# Altium PCB PCB DEMO.PcbDoc
Units mil, origin at the board's own origin, x right, y up, seen from the top; angles counter-clockwise.
Board outline 6000 x 4000 mil, 2 copper layers (Top Layer, Bottom Layer); 42 components, 28 nets, 130 pads, 22 vias.
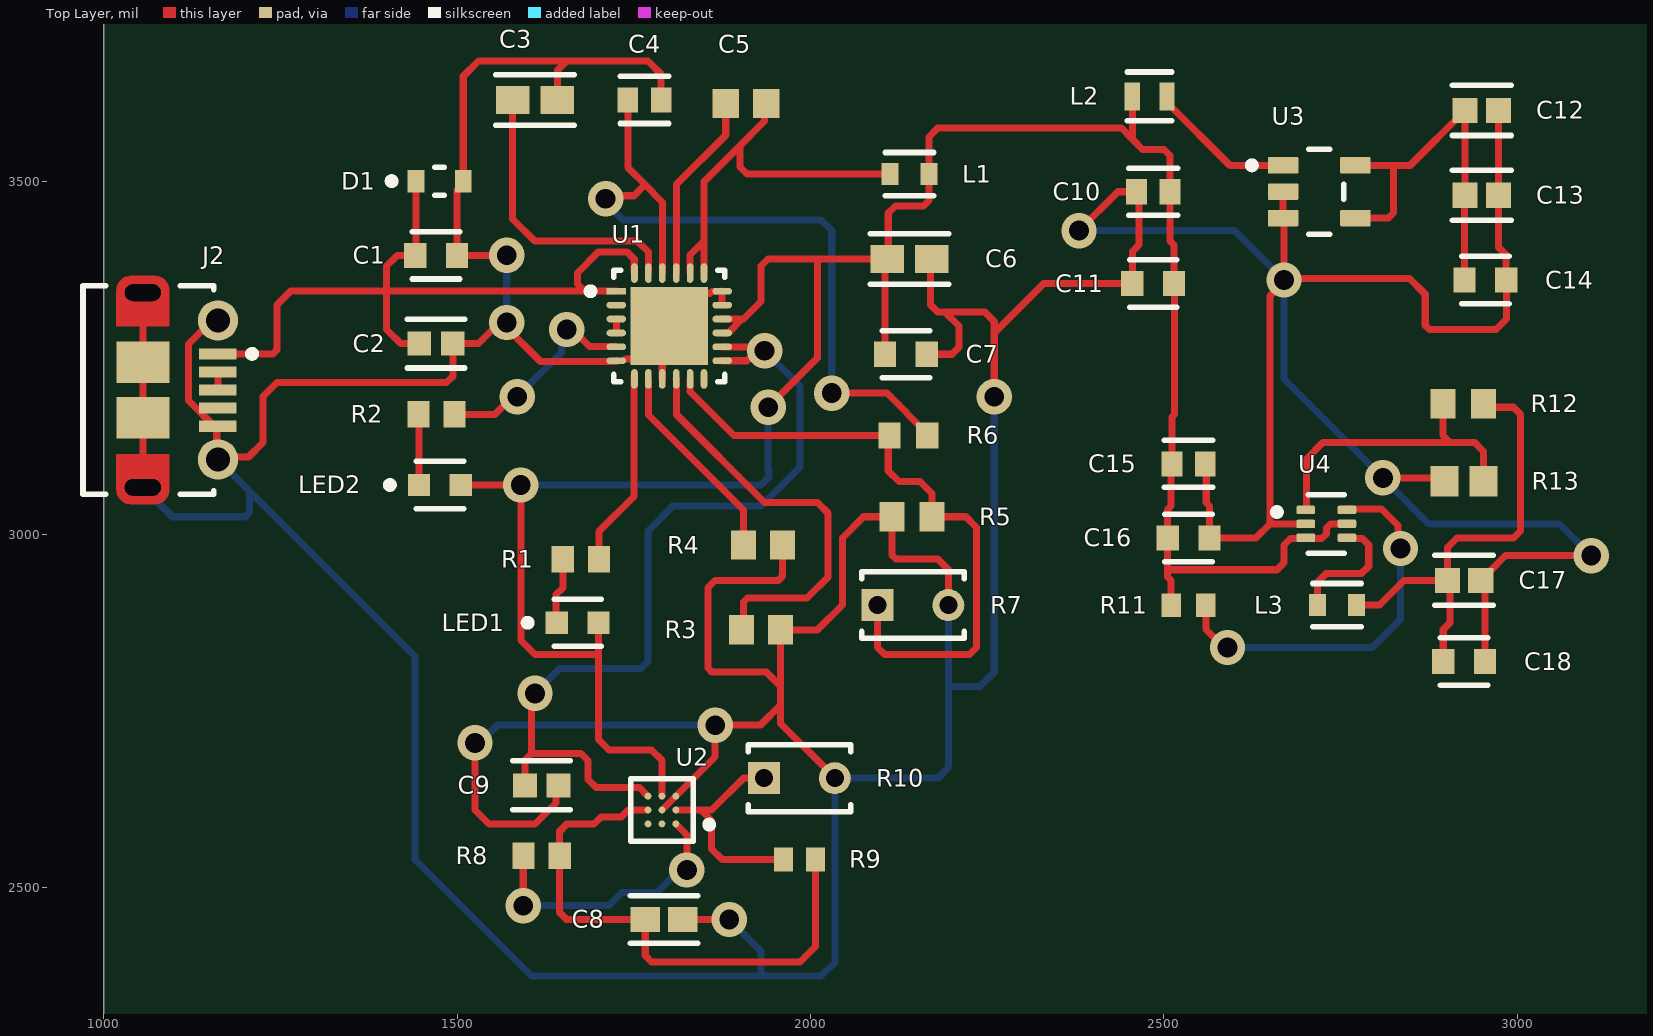
[diagram p0: Top Layer view]
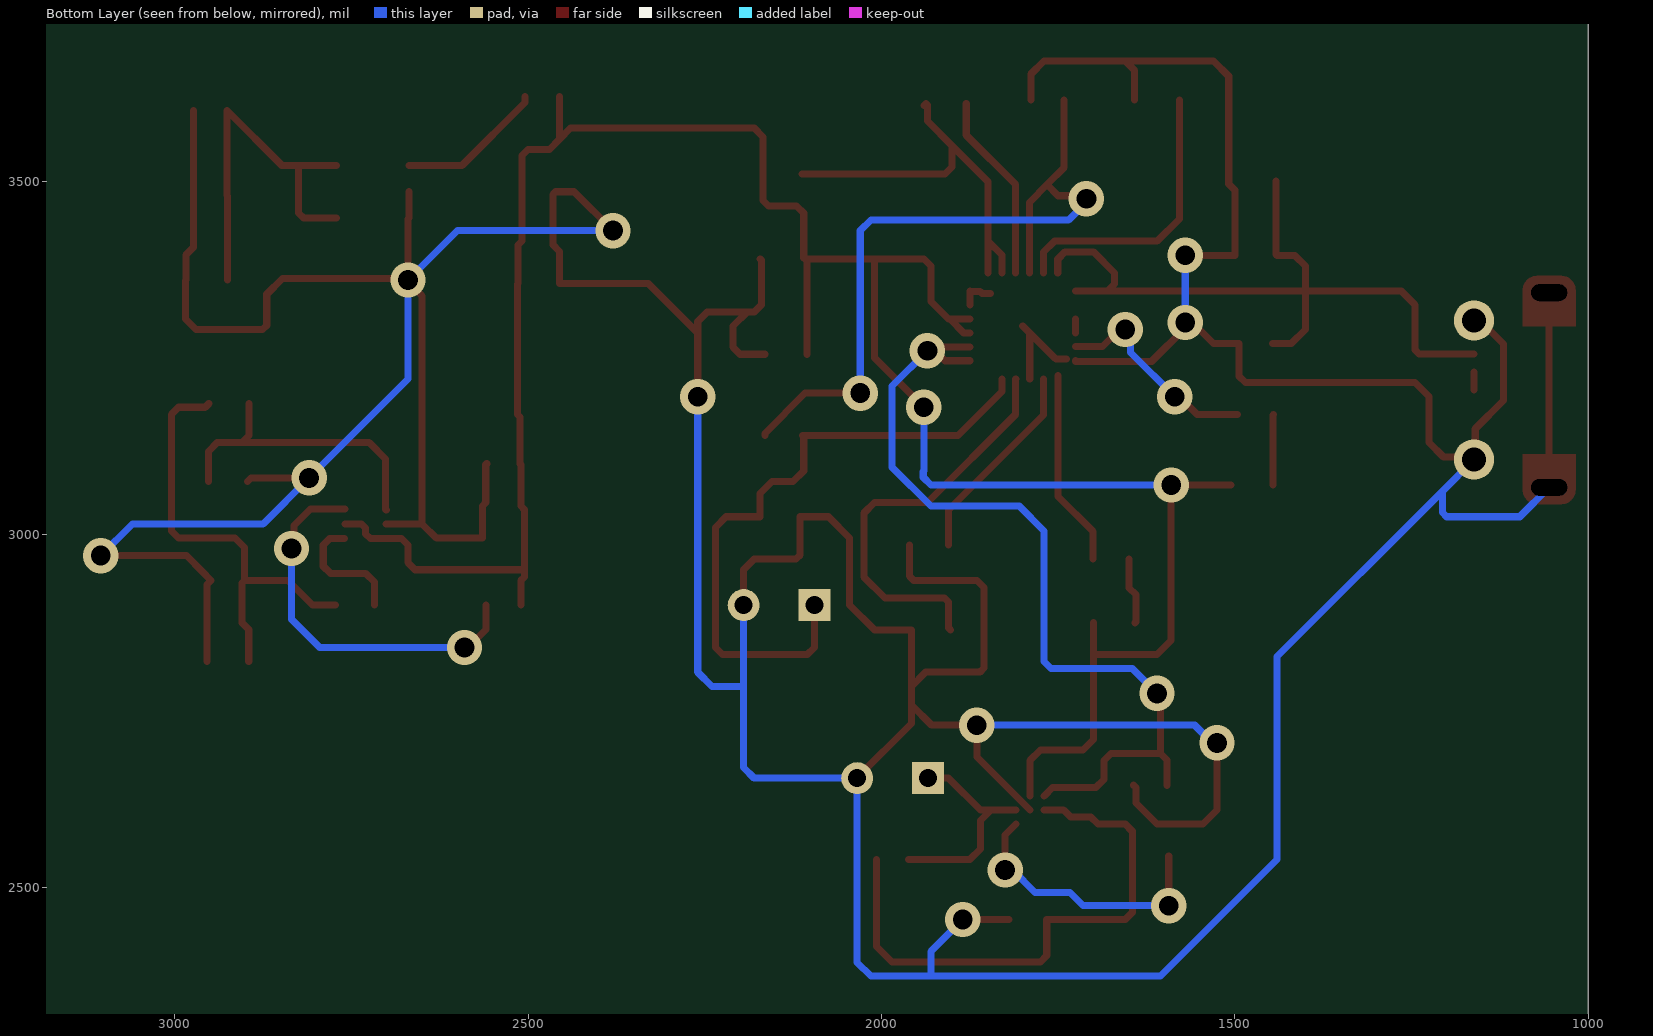
[diagram p1: Bottom Layer view, seen from below]
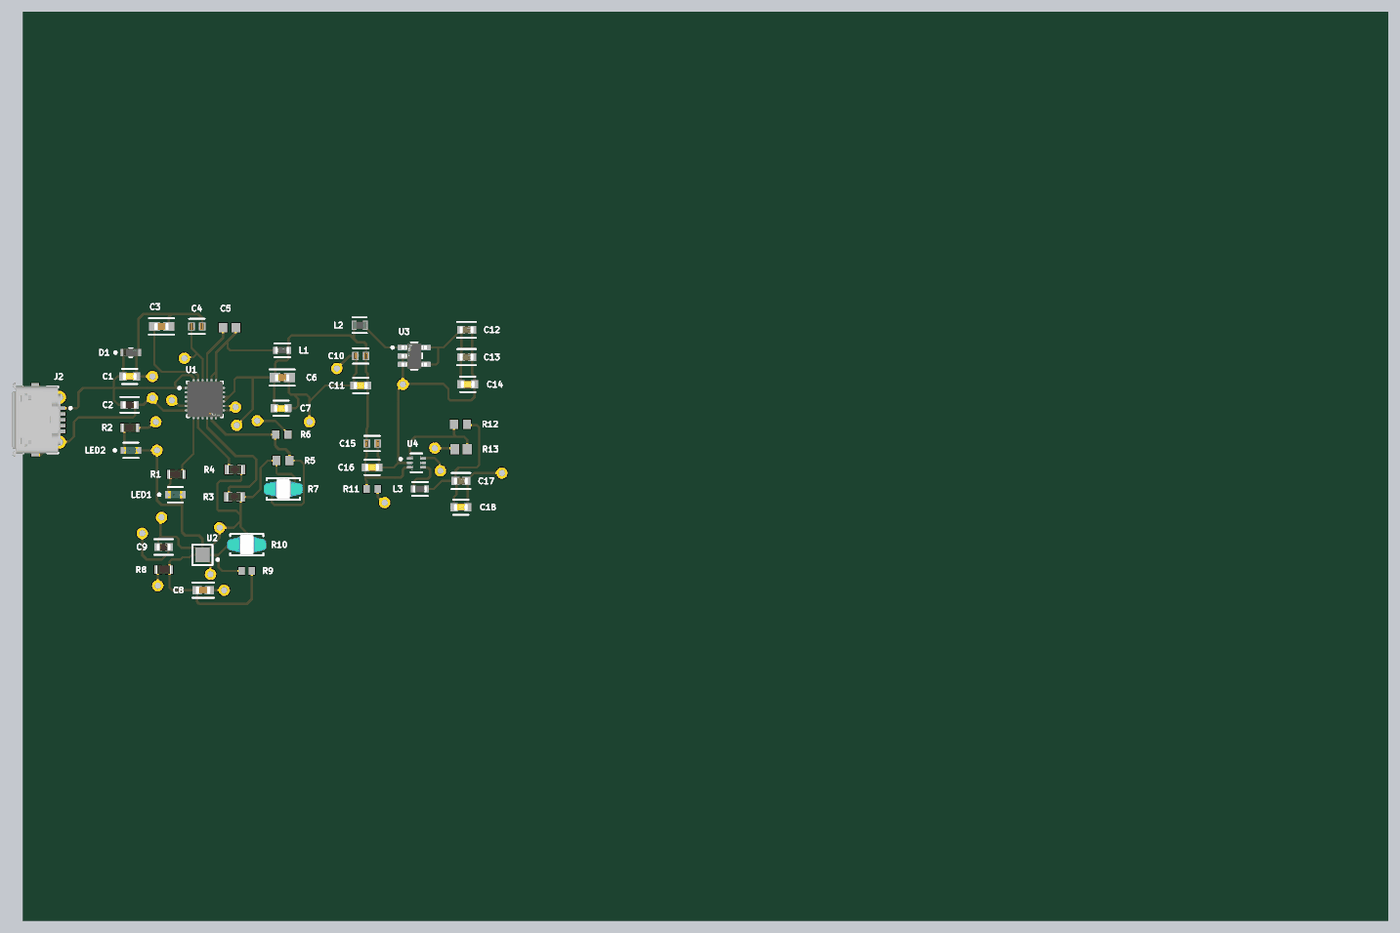
[diagram p2: 3D render of the assembled board from above, using the file's embedded part models]

## Layer stack, top to bottom
Top Solder: solder mask 0.4, Solder Resist, Dk 3.5
Top Layer: signal copper 1.4
Dielectric 1: dielectric 12.6, FR-4, Dk 4.8
Bottom Layer: signal copper 1.4
Bottom Solder: solder mask 0.4, Solder Resist, Dk 3.5

## Board outline
1000,1000 7000,1000 7000,5000 1000,5000

## Design rules (kind name [scope] priority, off if disabled: settings)
Clearance [All] p1 off: gap=4 ignorepadtopadclearanceinfootprint=FALSE
MinimumSolderMaskSliver [All] p1: minsoldermaskwidth=4
PolygonConnect [All] p1: connectstyle=Relief reliefconductorwidth=10 reliefentries=4 polygonreliefangle="90 Angle" airgapwidth=10
RoutingVias [All] p1: holewidth=28 width=50 viastyle="Through Hole" minholewidth=28 minwidth=50 maxholewidth=28 maxwidth=50
SilkToSolderMaskClearance [IsPad] p1 off: minsilkscreentomaskgap=10 clearancetoexposedcopper=TRUE
SolderMaskExpansion [All] p1: expansion=4 istentingtop=FALSE
Width [All] p1: maxlimit=10 minlimit=10 preferedwidth=10
28 further rules are at their usual default settings.

## Classes and differential pairs
component class S2: C10 C11 C12 C13 C14 C15 C16 C17 C18 L2 L3 R11 R12 R13 U3 U4
component class S1: B1 C1 C2 C3 C4 C5 C6 C7 C8 C9 D1 J1 J2 L1 LED1 LED2 R1 R2 R3 R4 R5 R6 R7 R8 R9 R10 U1 U2

## Components (designator, comment, footprint, x,y, rotation, side; value= is the part's Value field where it differs from the comment)
C1 "0.1uF" FP-CC0603-DA-MFG 1470,3395 r0 top value="100 nF"
C2 "1uF" FP-0603-L_1_6_0_15-W_0_8-IPC_C 1470,3270 r0 top
C3 "10uF" FP-GRM188-0_1-e0_2_0_55-IPC_A 1610,3615 r0 top
C4 "4.7uF" FP-C0603-CG-MFG 1765,3615 r0 top
C5 "47nF" CAPC1608X90X35ML10T15 1908.54,3610 r0 top
C6 "10uF" FP-GRM188-0_1-e0_2_0_55-IPC_A 2140,3390 r0 top
C7 "0.1uF" FP-CC0603-DA-MFG 2135,3255 r0 top value="100 nF"
C8 "0.47uF" FP-0603-L_1_6_0_1-W_0_8_0-IPC_B 1792.71,2455 r0 top
C9 "1uF" FP-0603-L_1_6_0_15-W_0_8-IPC_C 1619.37,2645 r0 top
C10 "4.7uF" FP-C0603-CG-MFG 2485,3485 r0 top
C11 "0.1uF" FP-CC0603-DA-MFG 2485,3355 r180 top value="100 nF"
C12 "22uF" FP-GRM188-0_2-IPC_C 2950,3600 r0 top
C13 "22uF" FP-GRM188-0_2-IPC_C 2950,3480 r0 top
C14 "0.1uF" FP-CC0603-DA-MFG 2955,3360 r0 top value="100 nF"
C15 "4.7uF" FP-C0603-CG-MFG 2535,3100 r0 top
C16 "0.1uF" FP-CC0603-DA-MFG 2535,2995 r0 top value="100 nF"
C17 "22uF" FP-GRM188-0_2-IPC_C 2925,2935 r0 top
C18 "0.1uF" FP-CC0603-DA-MFG 2925,2820 r0 top value="100 nF"
D1 "CZRU52C3V3" FP-0603-SOD-523F-MFG 1475,3500 r0 top
J2 "105017-0001" USB-MICRO-B_V 1108.15,3204.37 r270 top
L1 "1uH" FP-MLZ1608-MFG 2140,3510 r0 top
L2 "2.2uH" FP-CBMF1608-MFG 2480,3620 r0 top
L3 "1uH" FP-MLZ1608-MFG 2745,2900 r0 top
LED1 "LTST-C190GKT" FP-LTST-C190GKT-MFG 1670.47,2875 r0 top
LED2 "LTST-C190GKT" FP-LTST-C190GKT-MFG 1475.47,3070 r0 top
R1 "10K" RESC1609X50X30NL8T20 1675,2965 r0 top
R2 "10K" RESC1609X50X30NL8T20 1470.59,3170 r0 top
R3 "230" RESC1609X50X30ML8T20 1930,2865 r0 top
R4 "164" RESC1609X50X30ML8T20 1932.56,2985 r0 top
R5 "30.9K" RESC1608X55X30ML15T15 2143.54,3025 r0 top
R6 "5.23K" RESC1608X55X30NL15T15 2138.43,3140 r0 top
R7 "103AT-2" FP-103AT-2-MFG 2145,2900 r0 top
R8 "10K" RESC1609X50X30NL8T20 1619.37,2545 r0 top
R9 "1.8M" RESC1609X50X30LL10T20 1984.37,2540 r0 top
R10 "103AT-2" FP-103AT-2-MFG 1984.37,2655 r0 top
R11 "475K" RESC1608X55X30LL15T15 2535,2900 r0 top
R12 "453K" RESC1608X55X30ML15T15 2923.54,3185 r0 top
R13 "100K" RESC1608X55X30ML20T20 2925,3075 r0 top
U1 "BQ25606RGER" FP-RGE0024H-IPC_C 1800,3295 r0 top
U2 "BQ27421YZFR-G1A" FP-YZF0009-C01-MFG 1789.68,2610 r180 top
U3 "TPS613222ADBVR" FP-DBV0005A-MFG 2720,3485 r0 top
U4 "TLV62569APDRLR" FP-DRL0006A-MFG 2730,3015 r0 top

## Footprints (in the part's own frame and the unit in brackets; to place one, negate y for a bottom-side part, rotate by r counter-clockwise, add the part's x,y. Pads: shape width x height; smd on the part's side, far side on the other; paste and mask are expansions set on the pad)
CAPC1608X90X35ML10T15 [mm] "Chip Capacitor, 2-Leads, Body 1.60x0.80mm, IPC Low Density"
  rect 0.95x1.05 smd: 1(-0.725,0) 2(0.725,0)
  body extent -0.85,-0.45 0.85,0.45, height 0.9
FP-103AT-2-MFG [mm]
  rect 1.15x1.15 hole 0.65 paste-1000 mask+0: 1(-1.27,0)
  round 1.15 hole 0.65 paste-1000 mask+0: 2(1.27,0)
  silkscreen extent -1.85,-1.2 1.85,1.2, body extent -1.95,-1.3 1.95,1.3, height 0.25
FP-0603-L_1_6_0_1-W_0_8_0-IPC_B [mil]
  rect 41.64x35.91 smd paste+0 mask+0: 1(-26.66,0) 2(26.66,0)
  silkscreen extent -47,-34 47,34, body extent -57,-28 57,28, height 10
FP-0603-L_1_6_0_15-W_0_8-IPC_C [mil]
  rect 33.77x33.94 smd paste+0 mask+0: 1(-23.71,0) 2(23.71,0)
  silkscreen extent -41,-34 41,34, body extent -45,-23 45,23, height 10
FP-0603-SOD-523F-MFG [mm]
  rect 0.6x0.8 smd paste+0 mask+0: 1(-0.85,0) 2(0.85,0)
  silkscreen extent -1.85,-0.5 0.18,0.5, body extent -1.25,-0.6 1.25,0.6, height 0.25
FP-C0603-CG-MFG [mm]
  rect 0.75x0.9 smd paste+0 mask+0: 1(-0.6,0) 2(0.6,0)
  silkscreen extent -0.87,-0.85 0.87,0.85, body extent -1.2,-0.6 1.2,0.6, height 0.25
FP-CBMF1608-MFG [mm]
  rect 0.55x1 smd paste+0 mask+0: 1(-0.625,0) 2(0.625,0)
  silkscreen extent -0.8,-0.87 0.8,0.87, body extent -1,-0.6 1,0.6, height 0.25
FP-CC0603-DA-MFG [mm]
  rect 0.8x0.9 smd paste+0 mask+0: 1(-0.75,0) 2(0.75,0)
  silkscreen extent -0.85,-0.85 0.85,0.85, body extent -1.35,-0.75 1.35,0.75, height 0.25
FP-DBV0005A-MFG [mm]
  rrect17% 1.1x0.6 smd paste+0 mask+0: 1(-1.3,0.95) 2(-1.3,0) 3(-1.3,-0.95) 4(1.3,-0.95) 5(1.3,0.95)
  silkscreen extent -2.55,-1.53 0.87,1.53, body extent -1.95,-1.78 1.95,1.78, height 0.25
FP-DRL0006A-MFG [mm]
  rrect33% 0.67x0.3 smd paste+0 mask+0: 1(-0.74,0.5) 2(-0.74,0) 3(-0.74,-0.5) 4(0.74,-0.5) 5(0.74,0) 6(0.74,0.5)
  silkscreen extent -1.9,-1.05 0.65,1.05, body extent -1.17,-1.1 1.17,1.1, height 0.25
FP-GRM188-0_1-e0_2_0_55-IPC_A [mil]
  rect 47.57x39.85 smd paste+0 mask+0: 1(-31.57,0) 2(31.57,0)
  silkscreen extent -55,-36 55,36, body extent -75,-40 75,40, height 10
FP-GRM188-0_2-IPC_C [mil]
  rect 35.63x35.68 smd paste+0 mask+0: 1(-23.64,0) 2(23.64,0)
  silkscreen extent -41,-35 41,35, body extent -45,-24 45,24, height 10
FP-LTST-C190GKT-MFG [mm]
  rect 0.8x0.8 smd paste+0 mask+0: 1(-0.75,0) 2(0.75,0)
  silkscreen extent -1.92,-0.85 0.85,0.85, body extent -1.25,-0.55 1.25,0.55, height 0.25
FP-MLZ1608-MFG [mm]
  rect 0.6x0.8 smd paste+0 mask+0: 1(-0.7,0) 2(0.7,0)
  silkscreen extent -0.87,-0.77 0.87,0.77, body extent -1.1,-0.58 1.1,0.58, height 0.25
FP-RGE0024H-IPC_C [mm]
  rect 0.706x0.239 smd paste+0 mask+0: 1(-1.903,1.25)
  rrect100% 0.706x0.239 smd paste+0 mask+0: 2(-1.903,0.75) 3(-1.903,0.25) 4(-1.903,-0.25) 5(-1.903,-0.75) 6(-1.903,-1.25) 13(1.903,-1.25) 14(1.903,-0.75) 15(1.903,-0.25) 16(1.903,0.25) 17(1.903,0.75) 18(1.903,1.25)
  rrect100% 0.239x0.706 smd paste+0 mask+0: 7(-1.25,-1.903) 8(-0.75,-1.903) 9(-0.25,-1.903) 10(0.25,-1.903) 11(0.75,-1.903) 12(1.25,-1.903) 19(1.25,1.903) 20(0.75,1.903) 21(0.25,1.903) 22(-0.25,1.903) 23(-0.75,1.903) 24(-1.25,1.903)
  rect 2.8x2.8 smd paste-1000 mask+0: 25(0,0)
  silkscreen extent -2.96,-2 2,2, body extent -2.36,-2.36 2.36,2.36, height 0.25
FP-YZF0009-C01-MFG [mm]
  round 0.245 smd paste-1000 mask-1000: A1(-0.5,0.5) A2(0,0.5) A3(0.5,0.5) B1(-0.5,0) B2(0,0) B3(0.5,0) C1(-0.5,-0.5) C2(0,-0.5) C3(0.5,-0.5)
  silkscreen extent -1.83,-1.13 1.13,1.13, body extent -1.33,-1.31 1.33,1.31, height 0.25
RESC1608X55X30LL15T15 [mm] "Chip Resistor, 2-Leads, Body 1.60x0.80mm, IPC High Density"
  rect 0.7x0.85 smd: 1(-0.625,0) 2(0.625,0)
  body extent -0.87,-0.48 0.87,0.48, height 0.55
RESC1608X55X30ML15T15 [mm] "Chip Resistor, 2-Leads, Body 1.60x0.80mm, IPC Low Density"
  rect 0.9x1.05 smd: 1(-0.725,0) 2(0.725,0)
  body extent -0.87,-0.48 0.87,0.48, height 0.55
RESC1608X55X30ML20T20 [mm] "Chip Resistor, 2-Leads, Body 1.60x0.80mm, IPC Low Density"
  rect 1x1.1 smd: 1(-0.7,0) 2(0.7,0)
  body extent -0.9,-0.5 0.9,0.5, height 0.55
RESC1608X55X30NL15T15 [mm] "Chip Resistor, 2-Leads, Body 1.60x0.80mm, IPC Medium Density"
  rect 0.8x0.95 smd: 1(-0.675,0) 2(0.675,0)
  body extent -0.87,-0.48 0.87,0.48, height 0.55
RESC1609X50X30LL10T20 [mm] "Chip Resistor, 2-Leads, Body 1.55x0.85mm, IPC High Density"
  rect 0.7x0.85 smd: 1(-0.575,0) 2(0.575,0)
  body extent -0.82,-0.48 0.82,0.48, height 0.5
RESC1609X50X30ML8T20 [mm] "Chip Resistor, 2-Leads, Body 1.65x0.95mm, IPC Low Density"
  rect 0.9x1.05 smd: 1(-0.7,0) 2(0.7,0)
  body extent -0.82,-0.48 0.82,0.48, height 0.5
RESC1609X50X30NL8T20 [mm] "Chip Resistor, 2-Leads, Body 1.65x0.95mm, IPC Medium Density"
  rect 0.8x0.95 smd: 1(-0.65,0) 2(0.65,0)
  body extent -0.82,-0.48 0.82,0.48, height 0.5
USB-MICRO-B_V [mm] "USB, MICRO B, Body 7.491x4.695 mm, Pitch 0.65 mm"
  rect 0.4x1.35 smd: 1(-1.3,1.35) 2(-0.65,1.35) 3(0,1.35) 4(0.65,1.35) 5(1.3,1.35)
  round 1.45 hole 0.85: 6(-2.5,1.35) 7(2.5,1.35)
  rrect50% 0x0 hole 0.6 slot 1.3 at 90 deg: 8(-3.5,-1.35) 11(3.5,-1.35)
  rect 1.5x1.9 smd: 9(-1,-1.35) 10(1,-1.35)
  Top Layer circle w0.5: c3.6,-1.8 r0.25
  Top Layer circle w0.5: c-3.6,-0.9 r0.25
  Top Layer circle w0.5: c-3.6,-1.8 r0.25
  Top Layer region: -2.3,-2.3 -2.3,-0.4 -3.6,-0.4 -3.6,-2.3
  Top Layer region: 2.3,-0.4 2.3,-2.3 3.6,-2.3 3.6,-0.4
  Top Layer region: 3.6,-0.9 3.6,-1.8 4.1,-1.8 4.1,-0.9
  Top Layer region: -3.6,-1.8 -3.6,-0.9 -4.1,-0.9 -4.1,-1.8
  Top Layer lines w0.5: 3.5,-1.129 cw(c3.6,-0.9) 3.5,-0.671 cw(c3.6,-0.9) 3.6,-0.65 cw(c3.6,-0.9) 3.5,-1.129
  silkscreen extent -3.75,-3.5 3.75,2.7, body extent -4.1,-3.9 4.1,1.5, height 2.67

## Part data
C1 C7 C11 C14 C16 C18: library part CMP-2000-05002-2, "CAP CER 0.1UF 16V X7R 0603", Capacitance="100 nF", Manufacturer=YAGEO, Manufacturer Part Number=CC0603KRX7R7BB104, Package=CC0603-DA, Temperature="-55°C to +125°C", Temperature Characteristic=X7R, Temperature Coefficient=15%, Temperature Range High=+125°C, Temperature Range Low=-55°C, Tolerance=0.1, Voltage="16 V", Automotive=No, Category=Cap, ComponentLink2Description=Datasheet, ComponentLink2URL=http://www.yageo.com/documents/recent/UPY-GPHC_X7R_6.3V-to-50V_18.pdf, Device Class L1="Passive Components", Device Class L2=Capacitors, Device Class L3="Ceramic Capacitors", Digikey Description="CAP CER 0.1UF 16V X7R 0603", Footprint Url=http://www.yageo.com/exep/pages/download/literatures/UPY-C_GEN_24.pdf, Height=0.9mm, Lead Free=Yes, Material=Ceramic, Mouser Description="Multilayer Ceramic Capacitor, CC Series, 0.1 - F, - 10%, X7R, 16 V, 0603 [1608 Metric]", Octopart=https://octopart.com/cc0603krx7r7bb104-yageo-192941, RoHS=TRUE, Voltage Rating="16 V"
C2 C9: library part CMP-2000-07531-4, "Ceramic Capacitor General Use 1uF ±10% 50V X7R 0603", Case Code (Imperial)=0603, Case Code (Metric)=1608, Dielectric=X7R, Max Operating Temperature=125°C, Min Operating Temperature=-55°C, Package Quantity=1, Tolerance=10%, Voltage Rating=50V, Capacitance=1uF, Case/Package=0603, Construction=Flat, Depth=0.8mm, Halogen Free="Halogen Free", Height=0.8mm, Length=1.6mm, Mount="Surface Mount", Packaging="Tape and Reel", Radiation Hardening=No, RoHS Compliant=Yes, Series=M, Termination=SMD/SMT, Thickness=0.037inch, Voltage Rating (DC)=50V, Width=0.031inch
C3 C6: library part CMP-2006-02792-2, "Chip Multilayer Ceramic Capacitors for General Purpose, 0603, 10uF, X5R, 15%, 20%, 6.3V", Case Code (Imperial)=0603, Case Code (Metric)=1608, Dielectric=X5R, Max Operating Temperature=85°C, Min Operating Temperature=-55°C, Package Quantity=4000, Tolerance=20%, Voltage=6.3V, Capacitance=10uF, Case/Package=0603, Depth=0.8mm, Height=0.8mm, Lead Free="Lead Free", Length=1.6mm, Material=Ceramic, Mount="Surface Mount", Packaging="Tape and Reel", Radiation Hardening=No, REACH SVHC="No SVHC", Termination=SMD/SMT, Thickness=0.035inch, Voltage Rating=6.3V, Voltage Rating (DC)=6.3V, Width=0.031inch
C4 C10 C15: library part CMP-2006-02256-2, "CAP CER 4.7UF 6.3V X5R 0603", Manufacturer=Kemet, Manufacturer Part Number=C0603C475K9PACTU, Package=C0603-CG, Temperature="-55°C to +85°C", Temperature Characteristic=X5R, Temperature Coefficient=15%, Temperature Range High=+85°C, Temperature Range Low=-55°C, Tolerance=10%, Voltage Rating=6.3V, Automotive=No, Capacitance=4.7uF, Category=Cap, ComponentLink2Description=Datasheet, ComponentLink2URL=https://content.kemet.com/datasheets/KEM_C1006_X5R_SMD.pdf, Device Class L1="Passive Components", Device Class L2=Capacitors, Device Class L3="Ceramic Capacitors", Digikey Description="CAP CER 4.7UF 6.3V X5R 0603", Height=0.9mm, Ipc Land Pattern Name=CAPC16080X80, Lead Free=Yes, Material=Ceramic, Mouser Description="Multilayer Ceramic Capacitors MLCC - SMD/SMT 6.3volts 4.7uF X5R 10%", Octopart=https://octopart.com/c0603c475k9pactu-kemet-104242, RoHS=TRUE
C5: library part CMP-2006-02927-1, Manufacturer=Murata, Part Number=GRM188R71H473KA61D
C8: library part CMP-14477-000135-2, "None", Capacitance=470nF, Case Code (Imperial)=0603, Case Code (Metric)=1608, Dielectric=X7R, Max Operating Temperature=125°C, Min Operating Temperature=-55°C, Package Quantity=1, Tolerance=10%, Voltage=50V, Case/Package=0603, Construction=Flat, Depth=0.8mm, Halogen Free="Halogen Free", Height=0.8mm, Lead Free="Lead Free", Length=1.6mm, Mount="Surface Mount", Packaging="Tape and Reel", Radiation Hardening=No, RoHS Compliant=Yes, Series=M, Termination=SMD/SMT, Thickness=0.035inch, Voltage Rating=50V, Voltage Rating (DC)=50V, Width=0.031inch
C12 C13 C17: library part CMP-2000-06337-3, "Chip Multilayer Ceramic Capacitors for General Purpose, 0603, 22uF, X5R, 15%, 20%, 10V", Case Code (Imperial)=0603, Case Code (Metric)=1608, Dielectric=X5R, Max Operating Temperature=85°C, Min Operating Temperature=-55°C, Package Quantity=4000, Tolerance=20%, Voltage Rating=10V, Capacitance=22uF, Case/Package=0603, Depth=0.8mm, Height=0.8mm, Lead Free="Lead Free", Length=1.6mm, Material=Ceramic, Mount="Surface Mount", Packaging="Tape and Reel", REACH SVHC="No SVHC", Termination=SMD/SMT, Thickness=0.039inch, Voltage Rating (DC)=10V, Weight=0.000222oz, Width=0.8mm
D1: library part CMP-20229-000003-1, "DIODE ZENER 3.3V 150MW 0603", Case/Package=SMD/SMT, Max Operating Temperature=125°C, Max Power Dissipation=150mW, Max Reverse Leakage Current=25uA, Min Operating Temperature=-55°C, Output Current=500mA, Package Quantity=1, Tolerance=5%, Voltage Rating (DC)=3.3V, Zener Current=5mA, Element Configuration=Single, Impedance=95R, Lead Free="Lead Free", Mount="Surface Mount", Packaging="Tape and Reel", Power Dissipation=150mW, Power Rating=150mW, Voltage Tolerance=5%, Zener Voltage=3.3V
J2: library part CMP-2000-05827-1, "Micro-USB B Receptacle, Right Angle, Bottom Mount, Surface Mount, with Solder Tabs, -30 to 85 degC, 5-Pin USB, RoHS, Tape and Reel", Manufacturer=Molex, Package Description="5-Leads USB, Micro B, Body 7.5 x 5 mm, Pitch 0.65 mm", Package Reference=MICRO-B, Package Version="Rev. F, 12/2012", Standard Package=1, Voltage - Max=30V, 3D Model=105017-0001.stp, Catalog Drawings=1050170001, Category=Connectors,Interconnects, Circuits=5, Connector Type=USB-microB, Datasheet URL=http://www.molex.com/elqNow/elqRedir.htm?ref=http://www.molex.com/webdocs/datasheets/pdf/en-us/1050170001_IO_CONNECTORS.pdf, Datasheet Version=03/2016, Family=USB,DVI,HDMIConnectors, Featured Product=Micro-USBConnectorsUSBConnectors, Features=Shielded,SolderRetention, Gender=Receptacle, Ingress Protection=-, Manufacturer URL=http://www.molex.com/, Mating Products=WM17145-ND-CABLEMICROUSBBTOSTDA1.0MWM17147-ND-CABLEMICROUSBBTOSTDA2.0MWM17146-ND-CABLEMICROUSBBTOSTDA1.5M, Mounting Technology=SurfaceMount, Mounting Type=BoardCutout,SurfaceMount,RightAngle, Number of Contacts=5, Online Catalog=Molex-MicroUSB, Other Names=WM1399DKR, Package URL=http://www.molex.com/pdm_docs/sd/1050170001_sd.pdf, Packaging=Digi-Reel®, PCN Assembly/Origin=ResinSupplier21/Oct/2015, RoHS Information=1050170001CertofCompliance, Series=-, Specifications=-
L1 L3: library part CMP-08253-000001-2, "FIXED IND 1UH 600MA 150 MOHM SMD", Case Code (Imperial)=0603, Case Code (Metric)=1608, Current Rating=600mA, DC Resistance (DCR)=195mR, Max Operating Temperature=125°C, Min Operating Temperature=-55°C, Package Quantity=4000, Saturation Current=190mA, Self Resonant Frequency=170MHz, Test Frequency=10MHz, Tolerance=20%, Case/Package=0603, Core Material=Ferrite, Height - Seated (Max)=0.037inch, Inductance=1uH, Lead Free="Lead Free", Length=0.063inch, Mount="Surface Mount", Packaging="Tape and Reel", RoHS Compliant=Yes, Shielding=Shielded, Width=0.031inch
L2: library part CMP-14484-000379-1, "SMD Inductors 2.2uH ±20% 0.56A 0.221Ω 0603", Case Code (Imperial)=0603, Case Code (Metric)=1608, Current Rating=560mA, DC Resistance (DCR)=221mR, Inductance Tolerance=20%, Max Operating Temperature=105°C, Min Operating Temperature=-40°C, Package Quantity=1, Resistor Type=Wirewound, Saturation Current=190mA, Self Resonant Frequency=80MHz, Test Frequency=7.96MHz, Case/Package=0603, Core Material=Ferrite, DC Current=560mA, Depth=1mm, Halogen Free="Halogen Free", Height=0.8mm, Height - Seated (Max)=0.039inch, Inductance=2.2uH, Lead Free="Lead Free", Length=1.6mm, Max DC Current=560mA, Military Standard=Not, Mount="Surface Mount", Packaging="Tape and Reel", Radiation Hardening=No, RoHS Compliant=Yes, Series=CBMF, Shielding=Unshielded, Termination=SMD/SMT, Tolerance=20%, Width=0.8mm
LED1 LED2: library part CMP-22017-000005-2, "LED GREEN CLEAR CHIP SMD", Case Code (Imperial)=0603, Case Code (Metric)=1608, Color=Green, Forward Current=30mA, Forward Voltage=2.1V, Lens Color=Colorless, Max Operating Temperature=85°C, Min Operating Temperature=-55°C, Package Quantity=1, Power Dissipation=100mW, Reverse Voltage=5V, Test Current=10mA, Voltage=2V, Case/Package=0603, Depth=0.8mm, Dominant Wavelength=569nm, Height=0.8mm, Illumination Color=Green, Lead Free="Lead Free", Length=1.6mm, Lens Style=Clear, Lens Transparency=Clear, Luminous Intensity=6mcd, Mount="Surface Mount", Number of Elements=1, Number of LEDs=1, Number of Pins=2, Packaging="Tape and Reel", Power Rating=100mW, Radiation Hardening=No, Viewing Angle=130°, Wavelength=565nm, Width=0.8mm
R1 R2 R8: library part CMP-1666-00005-4, "Chip Resistor, 10 KOhm, +/- 1%, 100 mW, -55 to 155 degC, 0603 (1608 Metric), RoHS, Tape and Reel", Manufacturer="Vishay Semiconductor", Max Operating Temperature="155 degC", Min Operating Temperature="-55 degC", Package Quantity=5000, Voltage Rating="75 V", ComponentLink1Description="Manufacturer URL", ComponentLink1URL=http://www.vishay.com/, ComponentLink2Description=Datasheet, ComponentLink2URL=https://datasheet.ciiva.com/11809/0900766b80d98afc-11809037.pdf, DatasheetVersion=06/2012, Height="0.45 mm", Length="1.55 mm", Mounting Technology="Surface Mount", PackageDescription="2-Pin Surface Mount Device, Body 1.575 x 0.85 mm", PackageReference=0603, Packaging="Tape and Reel", REACH SVHC=Unknown, RoHSCompliant=true
R3 R4: library part CMP-2000-03824-5, "Chip Resistor, 100 Ohm, +/- 1%, 100 mW,-55 to 155 degC, 0603 (1608 Metric), RoHS, Tape and Ree", Manufacturer="Vishay Semiconductor", ComponentLink1Description="Manufacturer URL", ComponentLink1URL=http://www.vishay.com/, ComponentLink2Description=Datasheet, ComponentLink2URL=http://www.vishay.com/docs/20035/dcrcwe3.pdf, DatasheetVersion=06/2012, Mounting Technology="Surface Mount", PackageDescription="2-Pin Surface Mount Device, Body 1.575 x 0.85 mm", PackageReference=0603
R5: library part CMP-2000-00421-1, Manufacturer=Panasonic, Part Number=ERJ-3EKF3092V
R6: library part CMP-2000-00550-1, Manufacturer=Panasonic, Part Number=ERJ-3EKF5231V
R7 R10: library part CMP-2000-05824-2, "Thermistor NTC 10KOhm 1% 2-Pin", Max Operating Temperature=110°C, Min Operating Temperature=-50°C, Resistance=10kR, Tolerance=1%, Height=2.4mm, Lead Pitch=2.54mm, Length=17mm, Number of Pins=2, Packaging=Bulk, RoHS Compliant=Yes, Series=AT, Termination=Radial, Width=3.7mm
R9: library part CMP-2000-03043-1, Manufacturer="Vishay Dale", Part Number=CRCW06031M80JNEA
R11: library part CMP-2000-00528-1, Manufacturer=Panasonic, Part Number=ERJ-3EKF4753V
R12: library part CMP-2000-00514-1, Manufacturer=Panasonic, Part Number=ERJ-3EKF4533V
R13: library part CMP-2000-00875-1, Manufacturer=Panasonic, Part Number=ERA3AEB104V
U1: library part CMP-04911-000009-2, "IC BATT CHG LI-ION 1 CELL 24VQFN", Battery Pack Voltage=4.4V, Case/Package=VQFN, Max Charge Current=3A, Max Operating Temperature=85°C, Max Supply Voltage=13.5V, Min Operating Temperature=-40°C, Fault Protection="Over Voltage", Interface=USB, Mount="Surface Mount", Number of Cells=1, Packaging="Tape and Reel"
U2: library part CMP-04911-000026-1, "IC BATT FUEL GAUGE LICO2 9DSBGA", Capacity=8000mAh, Max Operating Temperature=85°C, Max Supply Voltage=4.5V, Min Operating Temperature=-40°C, Min Supply Voltage=2.45V, Operating Supply Current=93uA, Output Voltage=1.8V, Package Quantity=3000, Contact Plating=Copper, Interface=I2C, Lead Free="Lead Free", Mount="Surface Mount", Number of Cells=1, Number of Pins=9, Packaging="Tape and Reel", RoHS Compliant=Yes
U3: library part CMP-04918-000049-1, "IC REG BOOST 5V 2.5A SOT23-5", Manufacturer="Texas Instruments", Max Junction Temp=+125°C, Max Supply Voltage=5.5V, Min Supply Voltage=0.9V, Nominal Supply Current=6.5uA, Output Current=1.8A, Output Voltage=5V, Package=DBV0005A, Switching Frequency=2000kHz, Temperature="-40°C to +85°C", Temperature Range High=+85°C, Temperature Range Low=-40°C, Automotive=No, Category=IC, ComponentLink2Description=Datasheet, ComponentLink2URL=http://www.ti.com/lit/ds/symlink/tps61322.pdf, Device Class L1="Integrated Circuits (ICs)", Device Class L2="Power Management ICs", Device Class L3="Voltage Regulators - Switching", Digikey Description="IC REG BOOST 5V 2.5A SOT23-5", Height=1.45mm, Ipc Land Pattern Name=SOT95P280X145-5, Lead Free=Yes, Manufacturer Part Number=TPS613222ADBVR, Max Duty Cycle=90%, Mouser Description="6-uA Quiescent Current, 1.8-A Switch Current Boost Converter 5-SOT-23 -40 to 85", Number Of Outputs=1, Octopart=https://octopart.com/tps613222adbvr-texas+instruments-88135761, Output Type=Fixed, RoHS=TRUE, Standoff Height=0mm, Switching Topology=Boost
U4: library part CMP-04918-000614-1, "IC REG BUCK ADJ 2A SOT563", Case/Package=SOT-563, Max Input Voltage=5.5V, Max Operating Temperature=125°C, Min Input Voltage=2.5V, Min Operating Temperature=-40°C, Min Output Voltage=600mV, Output Current=2A, Switching Frequency=1.5MHz, Max Output Voltage=5.5V, Mount="Surface Mount", Output Configuration=Positive, Output Type=Adjustable, Packaging="Cut Tape", RoHS Compliant=Yes, Synchronous Rectifier=Yes

## Via types
v1: diameter 50, hole 28, Top Layer to Bottom Layer, 22 vias

## Nets (pads, with @x,y where several pads share a name; then routed paths per layer and width w, separated by ;. In a path a pad name is that pad's centre, name@x,y a point inside that pad or via, vN(x,y) a via of type N, cw(c..) or ccw(c..) an arc to the next point about the centre after c; other vN are vias at no path point)
1.8V: C8.1 R8.2 R9.2 U2.B3 | length 805.5
  Top Layer w10: U2.B3 1742.1,2610 1732.1,2600 1703.72,2600 1693.72,2590 1655,2590 1645,2580 R8.2 R8.2 R8.2 1645,2465 1655,2455 C8.1 1766.05,2403.95 1775,2395 1985,2395 2007.01,2417.01 R9.2
3V3: C17.1 C18.1 L3.2 R12.2 | length 647.7
  Top Layer w10: L3.2 2805,2900 2840,2935 C17.1 ; C18.1 2895.47,2865.47 2905,2875 2905,2931.36 C17.1 ; R12.2 2957.09,3180 2995,3180 3005,3170 3005,3005 2995,2995 2915,2995 2901.36,2981.36 C17.1
5V: C12.1 C13.1 C14.1 U3.4 U3.5 | length 552
  Top Layer w10: U3.4 2817.6,3447.6 2825,3455 2825,3522.4 ; U3.5 2825,3522.4 ; C14.1 2925.47,3479.12 C13.1 C12.1 2848.78,3522.4 2825,3522.4
BAT: C9.1 U1.13 U1.14 U2.C3 | length 1270.9
  Top Layer w10: C9.1 1595.66,2680.66 1605,2690 ; v1(1610,2775) 1605,2770 1605,2690 ; U2.C3@1769.68,2629.82 1757.87,2641.64 1696.64,2641.64 1685,2653.28 1685,2680 1675,2690 1605,2690 ; U1.13 1909.96,3245.79 1924.18,3260 v1(1935,3260) 1930,3265 U1.14@1874.92,3265
  Bottom Layer w10: v1(1610,2775) 1645,2810 1760,2810 1770,2820 1770,3005 1805,3040 1930,3040 1985,3095 1985,3210 v1(1935,3260)
GND: C1.2 C2.2 C3.2 C4.2 C6.2 C7.2 C8.2 C9.2 C10.1 C11.2 C12.2 C13.2 C14.2 C15.2 C16.2 C17.2 C18.2 D1.2 J2.4 J2.5 J2.6 J2.7 J2.8 J2.9 J2.10 J2.11 R3.2 R4.2 R5.1 R7.2 R10.2 R13.1 U1.6 U1.9 U1.17 U1.18 U1.25 U2.B2 U2.C1 U3.2 U3.3 U4.2 | length 10713.5
  Top Layer w10: J2.8 J2.9 J2.10 J2.11 1063.7,3066.57 1081.74,3066.57 ; J2.6 1152.88,3302.8 1119.72,3269.64 1119.72,3189.36 1159.6,3149.49 1159.6,3107.65 J2.7 1165.2,3109.84 1204.84,3109.84 1225,3130 1225,3195 1245,3215 1485,3215 1493.71,3223.71 C2.2 1530,3270 1560,3300 v1(1570,3300) 1570,3292.4 1617.4,3245 1725,3245 1725.08,3245.08 U1.6 ; v1(1525,2705) 1525,2610 1545,2590 1610,2590 1640,2620 1640,2641.92 C9.2 ; v1(1570,3395) C1.2 1499.53,3487.13 1508.46,3496.06 D1.2 1508.46,3648.46 1530,3670 1655,3670 ; C3.2 1641.57,3656.57 1655,3670 ; U1.6@1737.98,3247.98 U1.25@1752.98,3247.98 ; U1.25@1753.98,3248.98 U1.25@1790.16,3285.16 ; C4.2 1788.62,3651.38 1770,3670 1655,3670 ; U2.B2 1864.84,2685.16 1864.84,2694.84 1865,2695 v1(1865,2730) 1928.84,2730 1957.56,2758.72 ; U1.9 U1.25@1790.16,3285.16 ; U1.25 U1.25@1790.16,3285.16 ; C8.2 v1(1885,2455) ; U1.25@1846.02,3341.02 1857.38,3341.02 1860.28,3343.92 1874.63,3343.92 U1.18 U1.17 ; R4.2 1960.12,2940.86 1954.26,2935 1865,2935 1855,2925 1855,2810.86 1860.86,2805 1937.56,2805 1957.56,2785 ; R10.2 2034.37,2655.63 1957.56,2732.44 1957.56,2758.72 ; C7.2 2200,3255 2210,3265 2210,3295 2190,3315 ; C6.2 2170,3388.43 2170,3325 2180,3315 2190,3315 ; R7.2 2195,2950 2180,2965 2120.86,2965 2115,2970.86 R5.1 2075,3025 2045,2995 2045,2900 2010,2865 R3.2 1957.56,2785 ; v1(2260,3195) 2260,3285 ; v1(2380,3430) 2435,3485 C10.1 2465,3481.38 2465,3410 2455.47,3400.47 C11.2 2330,3355 2260,3285 ; C15.2 2560,3098.62 2560,3045 2564.53,3040.47 C16.2 2630,2995 2650,3015 ; U3.2 U3.3 2670,3446.42 v1(2670,3360) ; U4.2 2650,3015 ; v1(2810,3080) 2892.44,3080 R13.1 ; C18.2 2954.53,2929.12 C17.2 C17.2@2961.46,2947.84 ; C17.2@2961.48,2947.84 2983.64,2970 v1(3105,2970) ; C12.2 C13.2 2973.64,3406.36 2984.53,3395.47 C14.2 2985,3359.53 2985,3305 2970,3290 2875.86,3290 2870,3295.86 2870,3340 2847.72,3362.28 2672.28,3362.28 v1(2670,3360) ; 1957.56,2758.72 1957.56,2785 ; 2190,3315 2246.57,3315 2260,3301.57 2260,3285 ; 2650,3015 2650,3337.72 2670,3357.72 v1(2670,3360)
  Bottom Layer w10: J2.11 1096.57,3025 1200.26,3025 1206.12,3030.86 1206.12,3061.12 ; J2.7 1206.12,3061.12 ; v1(1525,2705) 1531.57,2705 1556.57,2730 v1(1865,2730) ; v1(1570,3300) v1(1570,3395) ; v1(1885,2455) 1930,2410 1930,2375 ; R7.2 2195,2785 ; v1(2260,3195) 2260,2805 2240,2785 2195,2785 ; v1(2380,3430) 2600,3430 v1(2670,3360) 2670,3220 v1(2810,3080) 2875,3015 3060,3015 v1(3105,2970) ; 1206.12,3061.12 1440,2827.24 1440,2540 1605,2375 1930,2375 ; 1930,2375 2015,2375 2034.37,2394.37 R10.2 2180,2655 2195,2670 2195,2785
NetC5_1: C5.1 U1.21 | length 269.1
  Top Layer w10: U1.21@1810,3369.92 1810,3495 1880,3565 C5.1
NetJ2_2: J2.2 J2.3 | length 25.6
  Top Layer w10: J2.3 J2.2
NetL2_2: L2.2 U3.1 | length 209.8
  Top Layer w10: L2.2 2504.61,3611.14 2593.35,3522.4 U3.1
NetL3_1: L3.1 U4.4 | length 178.1
  Top Layer w10: L3.1 2717.44,2932.44 2730,2945 2780,2945 2790,2955 2790,2985 2780.91,2994.09 U4.4@2760,2994.09
NetLED1_1: LED1.1 R1.1 | length 94.3
  Top Layer w10: LED1.1 1640,2875.94 1640,2915 1649.41,2924.41 R1.1
NetLED2_1: LED2.1 R2.1 | length 100.4
  Top Layer w10: R2.1 1445.94,3169.06 LED2.1
NetR3_1: R3.1 U1.10 | length 588.2
  Top Layer w10: U1.10 1810,3219.92 1810,3170 1935,3045 2010,3045 2025,3030 2025,2940 1995,2910 1910.86,2910 1905,2904.14 1905,2867.56 R3.1
NetR4_1: R4.1 U1.8 | length 290.8
  Top Layer w10: U1.8 1770.47,3168.95 1905,3034.42 R4.1
NetR8_1: R8.1 U2.A1 | length 395
  Top Layer w10: v1(1593.43,2474.42) 1593.43,2544.65 R8.1 ; U2.A1 1825,2574.68 v1(1825,2525)
  Bottom Layer w10: v1(1593.43,2474.42) 1594.01,2475 1715,2475 1733.36,2493.36 1782.54,2493.36 1814.18,2525 v1(1825,2525)
NetR9_1: R9.1 R10.1 U2.B1 | length 312.8
  Top Layer w10: U2.B1 1845,2610 ; R10.1 1905,2655 1860,2610 1845,2610 ; R9.1 1875,2540 1860,2555 1860,2595 1845,2610
NetR11_2: R11.2 U4.6 | length 553.2
  Top Layer w10: R11.2 2559.61,2865.39 2580,2845 2585,2845 v1(2590,2840) ; U4.6@2759.13,3035.91 2799.09,3035.91 2808.27,3035.91 2831.3,3012.87 2831.3,2983.7 v1(2835,2980)
  Bottom Layer w10: v1(2590,2840) 2795,2840 2835,2880 v1(2835,2980)
NetR12_1: R12.1 R13.2 U4.1 | length 439.7
  Top Layer w10: U4.1 2701.77,3035.59 2701.77,3106.77 2725,3130 2905,3130 ; R12.1 2895,3140 2905,3130 ; R13.2 2952.56,3117.44 2940,3130 2905,3130
NetU1_3: U1.3 U1.4 | length 19.7
  Top Layer w10: U1.4 U1.3
PG: R1.2 U1.7 | length 280.3
  Top Layer w10: R1.2 1700.59,3004.41 1750,3053.82 U1.7@1750,3224.88
PMID: C3.1 U1.23 | length 409.6
  Top Layer w10: C3.1 1578.43,3446.57 1610,3415 1755,3415 1770.45,3399.55 U1.23@1770.45,3369.95
REGN: C4.1 R6.2 U1.22 | length 1062.5
  Top Layer w10: v1(1710,3475) 1714.33,3479.33 1750,3479.33 1765.69,3495.02 ; C4.1 1741.38,3519.33 1765.69,3495.02 ; U1.22@1790.45,3369.92 1790.45,3469.81 1790,3470.26 1790,3470.7 1765.69,3495.02 ; v1(2030,3200) 2107.95,3200 2165,3142.95 R6.2
  Bottom Layer w10: v1(1710,3475) 1710,3470 1735,3445 2015,3445 2030,3430 v1(2030,3200)
SCL: U2.A3
SDA: U2.A2
STAT: R2.2 U1.5 | length 303.3
  Top Layer w10: R2.2 1553.43,3170 1578.43,3195 v1(1585,3195) ; v1(1655,3290) 1663.14,3290 1687.36,3265.79 U1.5@1725.08,3265.79
  Bottom Layer w10: v1(1585,3195) 1647.35,3257.35 1647.35,3282.35 v1(1655,3290)
SW: C5.2 L1.1 U1.19 U1.20 | length 580.4
  Top Layer w10: U1.20 1829.53,3395.32 1849.21,3415 ; U1.19 1849.21,3415 ; C5.2@1940,3607.09 C5.2 1935,3607.91 1935,3585 1900,3550 ; L1.1 1910,3510 1900,3520 1900,3550 ; 1849.21,3415 1849.21,3499.21 1900,3550
SYS: C6.1 C7.1 C10.2 C11.1 C15.1 C16.1 L1.2 L2.1 LED1.2 LED2.2 R11.1 U1.15 U1.16 U2.C2 U4.3 U4.5 | length 3494.7
  Top Layer w10: LED2.2 v1(1590,3070) 1590,2850 1610,2830 1700,2830 ; LED1.2 1700,2830 ; U2.C2 1789.68,2680.32 1775,2695 1715,2695 1700,2710 1700,2830 ; U1.15 1883.53,3285.16 1903.22,3304.84 ; U1.16 1903.22,3304.84 ; v1(1940,3180) 2010,3250 2010,3390 ; C7.1 2105.47,3387.04 C6.1 ; L2.1 2455.39,3559.61 ; R11.1 2510.39,2934.61 2505,2940 2505,2950 ; U4.5 2735.86,3015 2730,3009.14 2730,3000.86 2723.24,2994.09 2679.09,2994.09 2670,2985 2670,2960 2660,2950 2505,2950 ; 1903.22,3304.84 1905.16,3304.84 1930,3329.68 1930,3380 1940,3390 2010,3390 ; 2010,3390 C6.1 ; C6.1 2110,3391.57 2110,3455 2120,3465 2160,3465 2167.56,3472.56 L1.2 2167.56,3562.56 2180,3575 2440,3575 2455.39,3559.61 ; 2455.39,3559.61 2470,3545 2500,3545 2508.62,3536.38 C10.2 2508.62,3415.43 2514.53,3409.53 C11.1 2515,3354.53 2515,3170 2511.38,3166.38 C15.1 2510,3098.62 2510,3040 2505.47,3035.47 C16.1 2505,2994.53 2505,2950
  Bottom Layer w10: v1(1590,3070) 1930,3070 1940.86,3080.86 1940.86,3089.14 1940,3090 v1(1940,3180)
TS: R5.2 R6.1 R7.1 U1.11 | length 932.5
  Top Layer w10: U1.11 1829.53,3202.06 1891.59,3140 R6.1 2110,3138.15 2110,3090 2125,3075 2155,3075 2172.09,3057.91 R5.2 2220,3025 2235,3010 2235,2840 2225,2830 2105,2830 2095,2840 R7.1
VBUS: C1.1 C2.1 D1.1 J2.1 U1.1 U1.24 | length 1081.4
  Top Layer w10: J2.1 1239.14,3255.55 1245,3261.41 1245,3325 1264.21,3344.21 1400,3344.21 ; D1.1 1441.54,3396.06 C1.1 1415,3395 1400,3380 1400,3344.21 ; C2.1 1420,3270 1400,3290 1400,3344.21 ; U1.1 1680,3344.21 ; U1.24 1750.5,3370.21 1750.5,3389.5 1740,3400 1700,3400 1670,3370 1670,3354.21 1680,3344.21 ; 1400,3344.21 1680,3344.21
pads on no net: U1.2 U1.12

## Text inside footprints (layer, text, board x,y; h text height)
J2: Mechanical 1 "PCB EDGE" at 993.98,3487.83 h11.81 r270